# Altium PCB PCB1.PcbDoc
Units mil, origin at the board's own origin, x right, y up, seen from the top; angles counter-clockwise.
Board outline 3025 x 2605 mil, 2 copper layers (Top Layer, Bottom Layer); 24 components, 15 nets, 176 pads, 16 vias.
Unrouted connection lines stored in the file: 2.
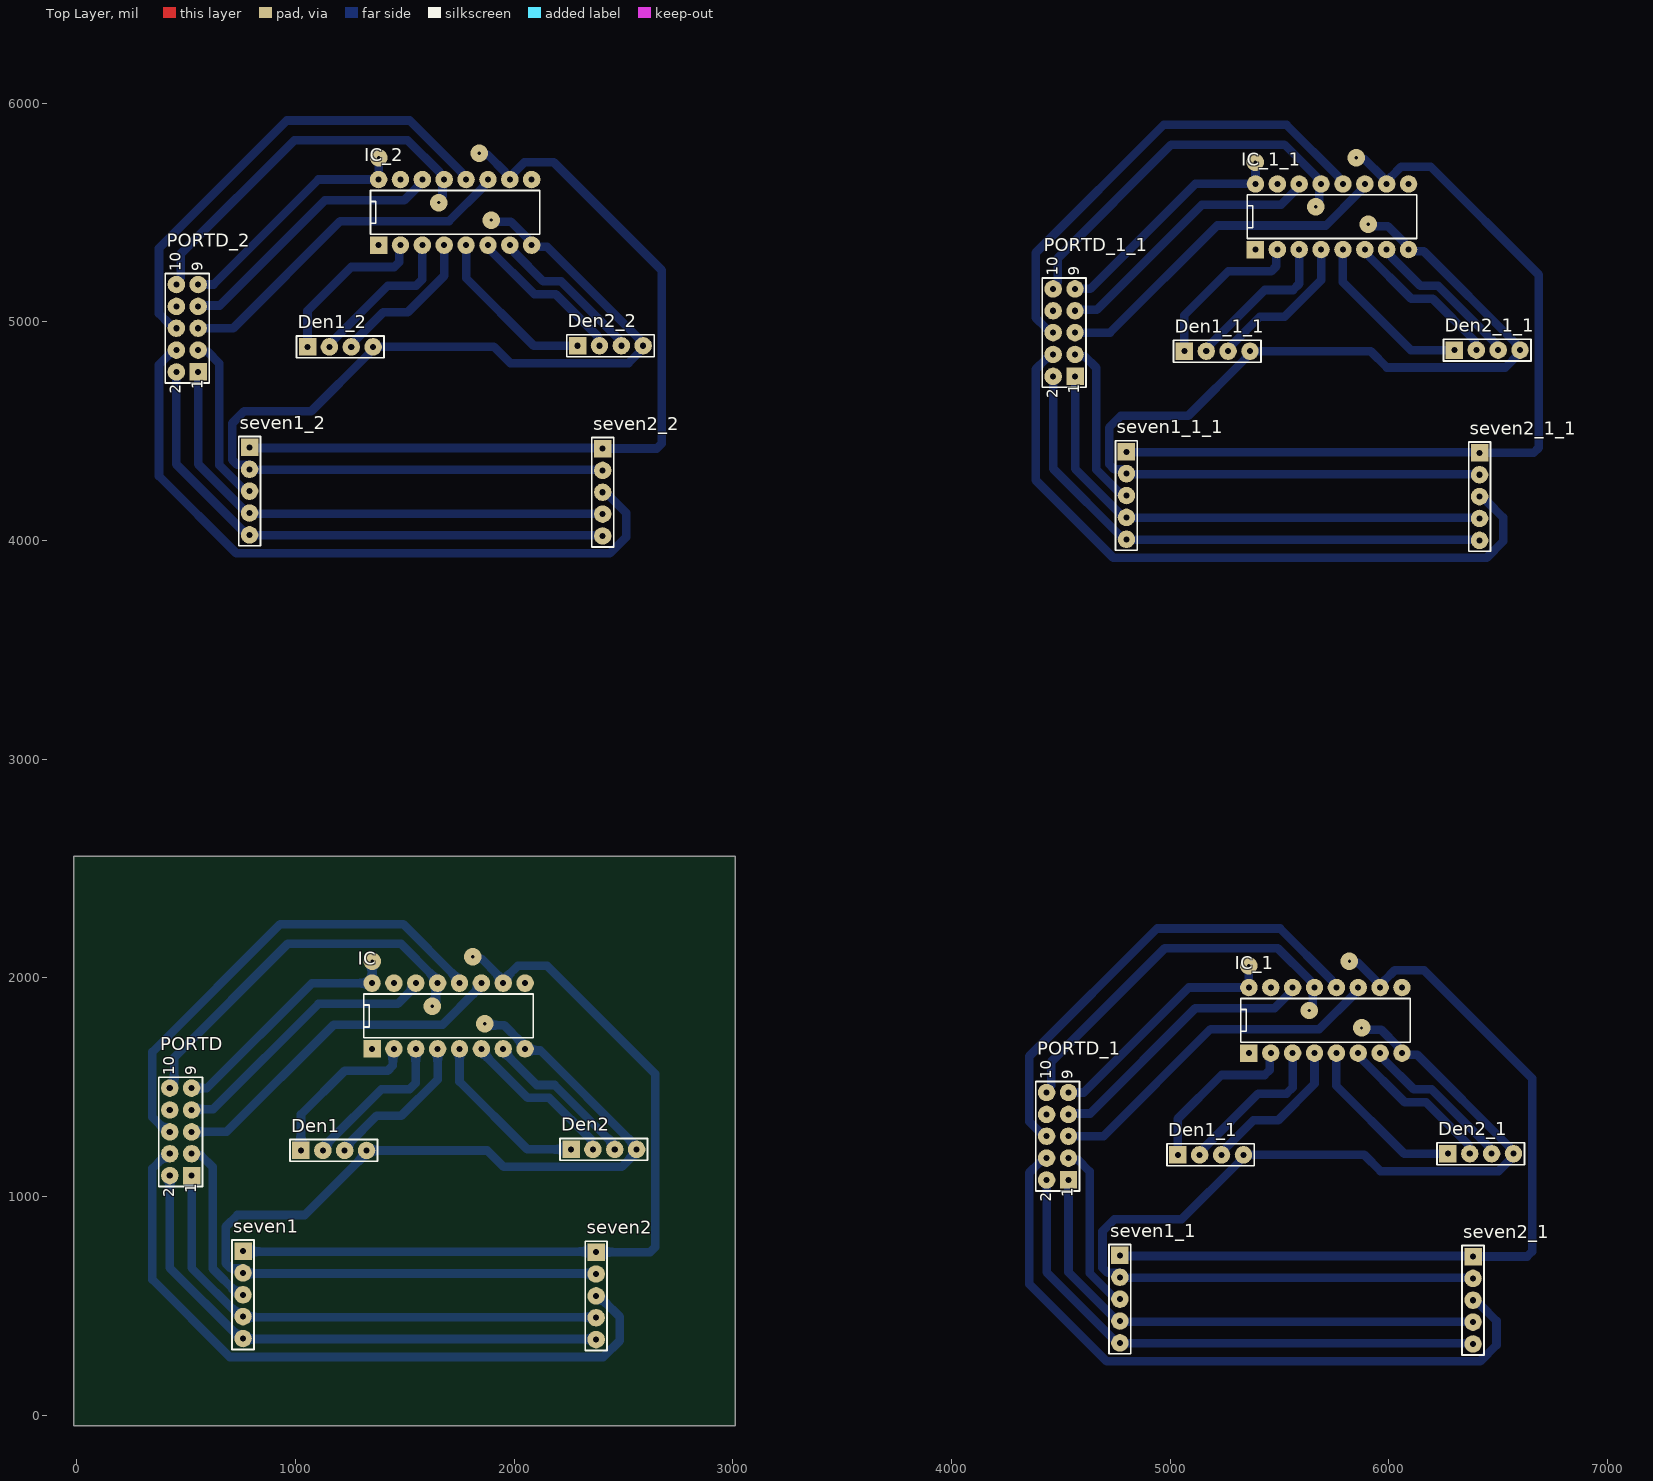
[diagram p0: Top Layer view]
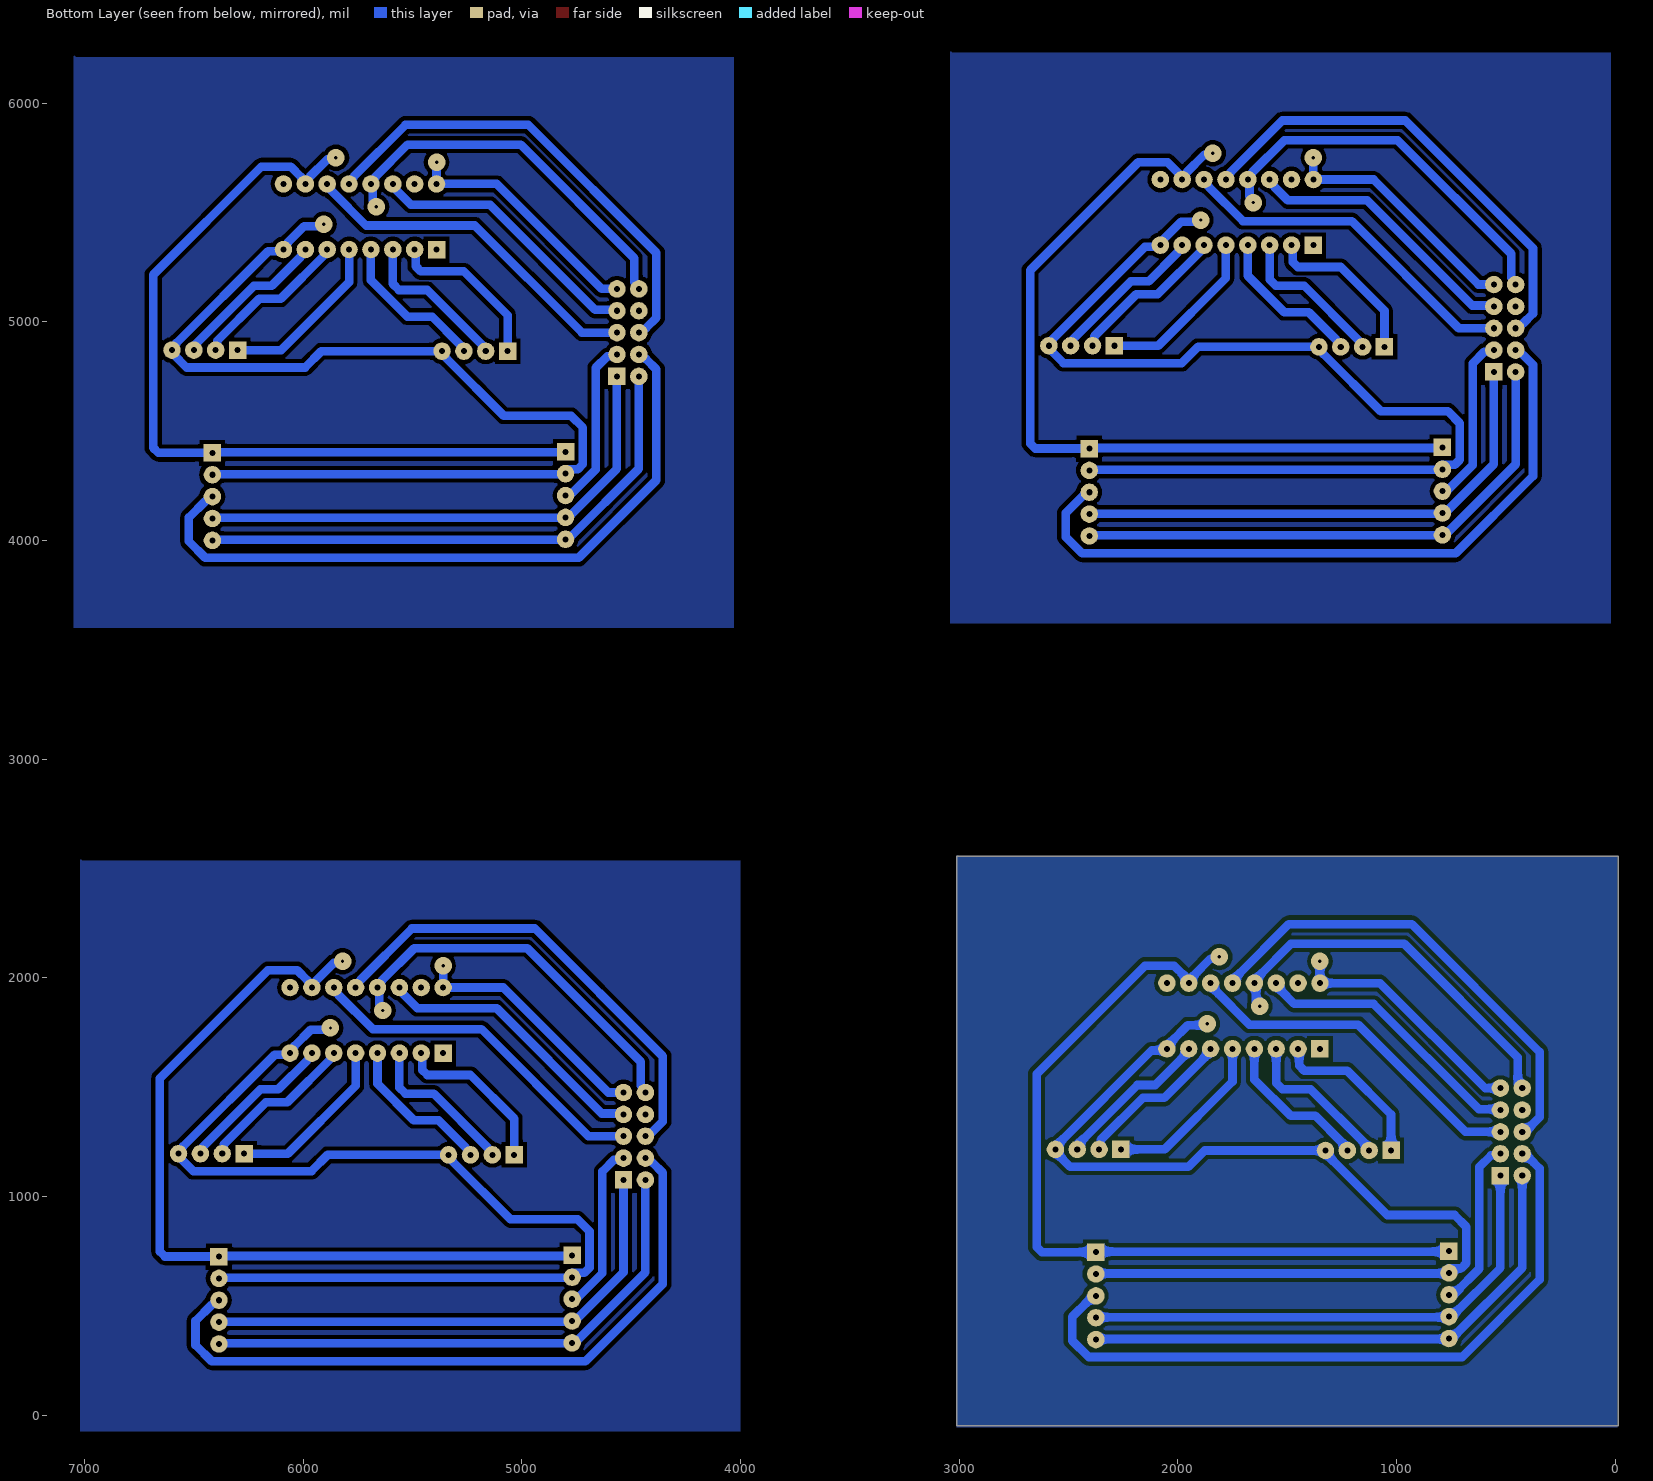
[diagram p1: Bottom Layer view, seen from below]

## Layer stack, top to bottom
Top Solder: solder mask 0.4, Solder Resist, Dk 3.5
Top Layer: signal copper 1.4
Dielectric 1: dielectric 12.6, FR-4, Dk 4.8
Bottom Layer: signal copper 1.4
Bottom Solder: solder mask 0.4, Solder Resist, Dk 3.5

## Board outline
-15,-50 -15,2555 3010,2555 3010,-50

## Design rules (kind name [scope] priority, off if disabled: settings)
Clearance [All] p1: gap=19.68 ignorepadtopadclearanceinfootprint=FALSE
HoleSize [All] p1: absolutevalues=TRUE maxlimit=59.06 minlimit=19.68 maxpercent=80.000 minpercent=20.000
PolygonConnect [All] p1: connectstyle=Relief reliefconductorwidth=10 reliefentries=4 polygonreliefangle="90 Angle" airgapwidth=10
RoutingVias [All] p1: holewidth=28 width=70 viastyle="Through Hole" minholewidth=28 minwidth=70 maxholewidth=28 maxwidth=70
SolderMaskExpansion [All] p1: expansion=4
Width [All] p1: maxlimit=59.06 minlimit=19.68 preferedwidth=39.37 minimp=50.000000 maximp=50.000000 favimp=50.000000
29 further rules are at their usual default settings.

## Components (designator, comment, footprint, x,y, rotation, side; value= is the part's Value field where it differs from the comment)
Den1 "Header 4" HDR1X4 1025,1210 r0 top
Den1_1 "Header 4" HDR1X4 5035,1190 r0 top (schematic designator Den1)
Den1_1_1 "Header 4" HDR1X4 5065,4865 r0 top (schematic designator Den1)
Den1_2 "Header 4" HDR1X4 1055,4885 r0 top (schematic designator Den1)
Den2 "Header 4" HDR1X4 2260,1215 r0 top
Den2_1 "Header 4" HDR1X4 6270,1195 r0 top (schematic designator Den2)
Den2_1_1 "Header 4" HDR1X4 6300,4870 r0 top (schematic designator Den2)
Den2_2 "Header 4" HDR1X4 2290,4890 r0 top (schematic designator Den2)
IC "74HC595" "DIP 16" 1350,1675 r0 top
IC_1 "74HC595" "DIP 16" 5360,1655 r0 top (schematic designator IC)
IC_1_1 "74HC595" "DIP 16" 5390,5330 r0 top (schematic designator IC)
IC_2 "74HC595" "DIP 16" 1380,5350 r0 top (schematic designator IC)
PORTD "Header 5X2" HDR2X5 525,1095 r90 top
PORTD_1 "Header 5X2" HDR2X5 4535,1075 r90 top (schematic designator PORTD)
PORTD_1_1 "Header 5X2" HDR2X5 4565,4750 r90 top (schematic designator PORTD)
PORTD_2 "Header 5X2" HDR2X5 555,4770 r90 top (schematic designator PORTD)
seven1 "Header 5" HDR1X5 760,750 r270 top
seven1_1 "Header 5" HDR1X5 4770,730 r270 top (schematic designator seven1)
seven1_1_1 "Header 5" HDR1X5 4800,4405 r270 top (schematic designator seven1)
seven1_2 "Header 5" HDR1X5 790,4425 r270 top (schematic designator seven1)
seven2 "Header 5" HDR1X5 2375,745 r270 top
seven2_1 "Header 5" HDR1X5 6385,725 r270 top (schematic designator seven2)
seven2_1_1 "Header 5" HDR1X5 6415,4400 r270 top (schematic designator seven2)
seven2_2 "Header 5" HDR1X5 2405,4420 r270 top (schematic designator seven2)

## Footprints (in the part's own frame and the unit in brackets; to place one, negate y for a bottom-side part, rotate by r counter-clockwise, add the part's x,y. Pads: shape width x height; smd on the part's side, far side on the other; paste and mask are expansions set on the pad)
"DIP 16" [mil]
  rect 80x80 hole 27.56: 1(0,0)
  round 80 hole 27.56: 2(100,0) 3(200,0) 4(300,0) 5(400,0) 6(500,0) 7(600,0) 8(700,0) 9(700,300) 10(600,300) 11(500,300) 12(400,300) 13(300,300) 14(200,300) 15(100,300) 16(0,300)
  silkscreen extent -38,50 738,250, body extent -75,-3 775,307, height 185
HDR1X4 [mil] "Connector; Header; 4 Position"
  rect 80x80 hole 27.56: 1(0,0)
  round 80 hole 27.56: 2(100,0) 3(200,0) 4(300,0)
  silkscreen extent -50,-50 350,50
HDR1X5 [mil] "Connector; Header; 5 Position"
  rect 80x80 hole 27.56: 1(0,0)
  round 80 hole 27.56: 2(100,0) 3(200,0) 4(300,0) 5(400,0)
  silkscreen extent -50,-50 450,50
HDR2X5 [mil] "Connector; Header; 5x2 Position"
  rect 80x80 hole 27.56: 1(0,0)
  round 80 hole 27.56: 2(0,100) 3(100,0) 4(100,100) 5(200,0) 6(200,100) 7(300,0) 8(300,100) 9(400,0) 10(400,100)
  silkscreen extent -50,-50 450,150, body extent -48,-50 452,150, height 365

## Part data
Den1 Den1_1 Den1_1_1 Den1_2 Den2 Den2_1 Den2_1_1 Den2_2: "Header, 4-Pin", LatestRevisionDate=17-Jul-2002, LatestRevisionNote="Re-released for DXP Platform.", Publisher="Altium Limited"
IC IC_1 IC_1_1 IC_2: "8-bit serial-in, serial or parallel-out  shift register with output latches;  3-state"
PORTD PORTD_1 PORTD_1_1 PORTD_2: "Header, 5-Pin, Dual row", LatestRevisionDate=17-Jul-2002, LatestRevisionNote="Re-released for DXP Platform.", Publisher="Altium Limited"
seven1 seven1_1 seven1_1_1 seven1_2 seven2 seven2_1 seven2_1_1 seven2_2: "Header, 5-Pin", LatestRevisionDate=17-Jul-2002, LatestRevisionNote="Re-released for DXP Platform.", Publisher="Altium Limited"

## Via types
v1: diameter 80, hole 15.75, Top Layer to Bottom Layer, 16 vias

## Nets (pads, with @x,y where several pads share a name; then routed paths per layer and width w, separated by ;. In a path a pad name is that pad's centre, name@x,y a point inside that pad or via, vN(x,y) a via of type N, cw(c..) or ccw(c..) an arc to the next point about the centre after c; other vN are vias at no path point)
D0: PORTD.1 seven1.4 seven2.4 | length 2366.6
  Bottom Layer w39.37: PORTD.1 525,672.75 739.98,457.77 752.23,457.77 seven1.4 762.5,447.5 2372.5,447.5 seven2.4
D1: PORTD.2 seven1.5 seven2.5 | length 2508
  Bottom Layer w39.37: PORTD.2 425,672.75 739.98,357.77 752.23,357.77 seven1.5 762.5,347.5 2372.5,347.5 seven2.5
D2: PORTD.3 seven1.3 | length 774.5
  Bottom Layer w39.37: PORTD.3 532.77,1187.23 568.45,1187.23 621.57,1134.1 621.57,669.23 733.03,557.77 752.23,557.77 seven1.3
D3: PORTD.4 seven2.3 | length 3186.3
  Bottom Layer w39.37: PORTD.4 414.01,1195 393.38,1174.37 392.12,1174.37 345.63,1127.88 345.63,619.37 699.37,265.63 2407.88,265.63 2482.32,340.07 2482.32,449.93 2407.88,524.37 2406.62,524.37 2385.99,545 seven2.3
D4: IC.11 PORTD.5 | length 1613.8
  Bottom Layer w39.37: PORTD.5 685,1295 1175,1785 1672.25,1785 1829.37,1942.12 1829.37,1943.38 1850,1964.01 IC.11
D5: IC.12 PORTD.6 | length 2171.1
  Bottom Layer w39.37: PORTD.6 414.01,1295 393.38,1315.63 392.12,1315.63 345.63,1362.12 345.63,1660.63 930,2245 1492.25,2245 1729.37,2007.88 1729.37,2006.62 1750,1985.99 IC.12
D6: IC.14 PORTD.7 | length 1272.4
  Bottom Layer w39.37: PORTD.7 529.06,1399.06 624.06,1399.06 1105,1880 1467.25,1880 1529.37,1942.12 1529.37,1943.38 1550,1964.01 IC.14
GND: Den1.4 Den2.4 IC.8 IC.13 PORTD.10 seven1.2 seven2.2 | length 6712.5
  Bottom Layer w39.37: PORTD.10 425,1505.99 445.63,1526.62 445.63,1635.63 965,2155 1482.25,2155 1629.37,2007.88 1629.37,2006.62 1650,1985.99 IC.13 1642.23,1967.23 1642.23,1898.22 1625,1880.99 v1(1625,1870) ; v1(1865,1790) 1872.77,1782.23 1955.02,1782.23 2029.37,1707.88 2029.37,1706.62 2050,1685.99 IC.8 2057.77,1667.23 2120.02,1667.23 2539.37,1247.88 2539.37,1246.62 2560,1225.99 Den2.4 2552.23,1207.23 2552.23,1194.98 2492.88,1135.63 1951.62,1135.63 1877.25,1210 Den1.4 1325,1199.01 1304.37,1178.38 1304.37,1177.12 1042.25,915 735,915 680.63,860.63 680.63,693.69 703.69,670.63 762.5,670.63 762.5,652.5 seven1.2 762.5,647.5 2372.5,647.5 seven2.2
Q2: Den1.1 IC.2 | length 756.4
  Bottom Layer w39.37: Den1.1 1025,1375 1225,1575 1421.94,1575 1445,1598.06 1445,1670 IC.2
Q3: Den1.2 IC.3 | length 716.7
  Bottom Layer w39.37: Den1.2 1125,1220.99 1145.63,1241.62 1145.63,1242.88 1392.75,1490 1521.94,1490 1550,1518.06 IC.3
Q4: Den1.3 IC.4 | length 707.1
  Bottom Layer w39.37: Den1.3 1225,1220.99 1245.63,1241.62 1245.63,1242.88 1370.99,1368.24 1483.69,1368.24 1650,1534.55 IC.4
Q5: Den2.1 IC.5 | length 788.4
  Bottom Layer w39.37: IC.5 1750,1525 2060,1215 Den2.1
Q6: Den2.2 IC.6 | length 728.6
  Bottom Layer w39.37: IC.6 1857.77,1667.23 1857.77,1654.98 2062.47,1450.29 2160.39,1450.29 2352.23,1258.45 2352.23,1222.77 Den2.2
Q7: Den2.3 IC.7 | length 719
  Bottom Layer w39.37: IC.7 1950,1664.01 1970.63,1643.38 1970.63,1642.12 2103.41,1509.34 2184.85,1509.34 2452.23,1241.97 2452.23,1222.77 Den2.3
VCC: IC.10 IC.16 PORTD.9 seven1.1 seven2.1 | length 4949.1
  Bottom Layer w39.37: PORTD.9 595,1495 1075,1975 IC.16 v1(1350,2075) ; seven1.1 762.5,747.5 2372.5,747.5 seven2.1 2621.94,745 2645,768.06 2645,1560 2150.63,2054.37 2017.12,2054.37 1970,2007.25 1970,2005.99 IC.10@1950,1985.99 ; v1(1810,2095) 1817.77,2087.23 1850.02,2087.23 1929.37,2007.88 1929.37,2006.62 IC.10@1950,1985.99 ; IC.10@1942.23,1982.77 IC.10 IC.10@1950,1985.99
pads on no net: Den1_1.1 Den1_1.2 Den1_1.3 Den1_1.4 Den1_1_1.1 Den1_1_1.2 Den1_1_1.3 Den1_1_1.4 Den1_2.1 Den1_2.2 Den1_2.3 Den1_2.4 Den2_1.1 Den2_1.2 Den2_1.3 Den2_1.4 Den2_1_1.1 Den2_1_1.2 Den2_1_1.3 Den2_1_1.4 Den2_2.1 Den2_2.2 Den2_2.3 Den2_2.4 IC.1 IC.9 IC.15 IC_1.1 IC_1.2 IC_1.3 IC_1.4 IC_1.5 IC_1.6 IC_1.7 IC_1.8 IC_1.9 IC_1.10 IC_1.11 IC_1.12 IC_1.13 IC_1.14 IC_1.15 IC_1.16 IC_1_1.1 IC_1_1.2 IC_1_1.3 IC_1_1.4 IC_1_1.5 IC_1_1.6 IC_1_1.7 IC_1_1.8 IC_1_1.9 IC_1_1.10 IC_1_1.11 IC_1_1.12 IC_1_1.13 IC_1_1.14 IC_1_1.15 IC_1_1.16 IC_2.1 IC_2.2 IC_2.3 IC_2.4 IC_2.5 IC_2.6 IC_2.7 IC_2.8 IC_2.9 IC_2.10 IC_2.11 IC_2.12 IC_2.13 IC_2.14 IC_2.15 IC_2.16 PORTD.8 PORTD_1.1 PORTD_1.2 PORTD_1.3 PORTD_1.4 PORTD_1.5 PORTD_1.6 PORTD_1.7 PORTD_1.8 PORTD_1.9 PORTD_1.10 PORTD_1_1.1 PORTD_1_1.2 PORTD_1_1.3 PORTD_1_1.4 PORTD_1_1.5 PORTD_1_1.6 PORTD_1_1.7 PORTD_1_1.8 PORTD_1_1.9 PORTD_1_1.10 PORTD_2.1 PORTD_2.2 PORTD_2.3 PORTD_2.4 PORTD_2.5 PORTD_2.6 PORTD_2.7 PORTD_2.8 PORTD_2.9 PORTD_2.10 seven1_1.1 seven1_1.2 seven1_1.3 seven1_1.4 seven1_1.5 seven1_1_1.1 seven1_1_1.2 seven1_1_1.3 seven1_1_1.4 seven1_1_1.5 seven1_2.1 seven1_2.2 seven1_2.3 seven1_2.4 seven1_2.5 seven2_1.1 seven2_1.2 seven2_1.3 seven2_1.4 seven2_1.5 seven2_1_1.1 seven2_1_1.2 seven2_1_1.3 seven2_1_1.4 seven2_1_1.5 seven2_2.1 seven2_2.2 seven2_2.3 seven2_2.4 seven2_2.5
copper on no net: | length 89911.4
  Bottom Layer w39.37: 455,4770 455,4347.75 769.98,4032.77 782.23,4032.77 790,4025 792.5,4022.5 2402.5,4022.5 2405,4020 ; 455,4870 444.01,4870 423.38,4849.37 422.12,4849.37 375.63,4802.88 375.63,4294.37 729.37,3940.63 2437.88,3940.63 2512.32,4015.07 2512.32,4124.93 2437.88,4199.37 2436.62,4199.37 2415.99,4220 2405,4220 ; 455,4970 444.01,4970 423.38,4990.63 422.12,4990.63 375.63,5037.12 375.63,5335.63 960,5920 1522.25,5920 1759.37,5682.88 1759.37,5681.62 1780,5660.99 1780,5650 ; 455,5170 455,5180.99 475.63,5201.62 475.63,5310.63 995,5830 1512.25,5830 1659.37,5682.88 1659.37,5681.62 1680,5660.99 1680,5650 1672.23,5642.23 1672.23,5573.22 1655,5555.99 v1(1655,5545) ; 555,4770 555,4347.75 769.98,4132.77 782.23,4132.77 790,4125 792.5,4122.5 2402.5,4122.5 2405,4120 ; 555,4870 562.77,4862.23 598.45,4862.23 651.57,4809.1 651.57,4344.23 763.03,4232.77 782.23,4232.77 790,4225 ; 555,4970 715,4970 1205,5460 1702.25,5460 1859.37,5617.12 1859.37,5618.38 1880,5639.01 1880,5650 ; 555,5070 559.06,5074.06 654.06,5074.06 1135,5555 1497.25,5555 1559.37,5617.12 1559.37,5618.38 1580,5639.01 1580,5650 ; 555,5170 625,5170 1105,5650 1380,5650 v1(1380,5750) ; 790,4425 792.5,4422.5 2402.5,4422.5 2405,4420 2651.94,4420 2675,4443.06 2675,5235 2180.63,5729.37 2047.12,5729.37 2000,5682.25 2000,5680.99 1980,5660.99 ; 1055,4885 1055,5050 1255,5250 1451.94,5250 1475,5273.06 1475,5345 1480,5350 ; 1155,4885 1155,4895.99 1175.63,4916.62 1175.63,4917.88 1422.75,5165 1551.94,5165 1580,5193.06 1580,5350 ; 1255,4885 1255,4895.99 1275.63,4916.62 1275.63,4917.88 1400.99,5043.24 1513.69,5043.24 1680,5209.55 1680,5350 ; 1780,5350 1780,5200 2090,4890 2290,4890 ; v1(1840,5770) 1847.77,5762.23 1880.02,5762.23 1959.37,5682.88 1959.37,5681.62 1980,5660.99 ; 1880,5350 1887.77,5342.23 1887.77,5329.98 2092.47,5125.29 2190.39,5125.29 2382.23,4933.45 2382.23,4897.77 2390,4890 ; v1(1895,5465) 1902.77,5457.23 1985.02,5457.23 2059.37,5382.88 2059.37,5381.62 2080,5360.99 2080,5350 2087.77,5342.23 2150.02,5342.23 2569.37,4922.88 2569.37,4921.62 2590,4900.99 2590,4890 2582.23,4882.23 2582.23,4869.98 2522.88,4810.63 1981.62,4810.63 1907.25,4885 1355,4885 1355,4874.01 1334.37,4853.38 1334.37,4852.12 1072.25,4590 765,4590 710.63,4535.63 710.63,4368.69 733.69,4345.63 792.5,4345.63 792.5,4327.5 790,4325 792.5,4322.5 2402.5,4322.5 2405,4320 ; 1972.23,5657.77 1980,5650 1980,5660.99 ; 1980,5350 1980,5339.01 2000.63,5318.38 2000.63,5317.12 2133.41,5184.34 2214.85,5184.34 2482.23,4916.97 2482.23,4897.77 2490,4890 ; 4435,1075 4435,652.75 4749.98,337.77 4762.23,337.77 4770,330 4772.5,327.5 6382.5,327.5 6385,325 ; 4435,1175 4424.01,1175 4403.38,1154.37 4402.12,1154.37 4355.63,1107.88 4355.63,599.37 4709.37,245.63 6417.88,245.63 6492.32,320.07 6492.32,429.93 6417.88,504.37 6416.62,504.37 6395.99,525 6385,525 ; 4435,1275 4424.01,1275 4403.38,1295.63 4402.12,1295.63 4355.63,1342.12 4355.63,1640.63 4940,2225 5502.25,2225 5739.37,1987.88 5739.37,1986.62 5760,1965.99 5760,1955 ; 4435,1475 4435,1485.99 4455.63,1506.62 4455.63,1615.63 4975,2135 5492.25,2135 5639.37,1987.88 5639.37,1986.62 5660,1965.99 5660,1955 5652.23,1947.23 5652.23,1878.22 5635,1860.99 v1(5635,1850) ; 4465,4750 4465,4327.75 4779.98,4012.77 4792.23,4012.77 4800,4005 4802.5,4002.5 6412.5,4002.5 6415,4000 ; 4465,4850 4454.01,4850 4433.38,4829.37 4432.12,4829.37 4385.63,4782.88 4385.63,4274.37 4739.37,3920.63 6447.88,3920.63 6522.32,3995.07 6522.32,4104.93 6447.88,4179.37 6446.62,4179.37 6425.99,4200 6415,4200 ; 4465,4950 4454.01,4950 4433.38,4970.63 4432.12,4970.63 4385.63,5017.12 4385.63,5315.63 4970,5900 5532.25,5900 5769.37,5662.88 5769.37,5661.62 5790,5640.99 5790,5630 ; 4465,5150 4465,5160.99 4485.63,5181.62 4485.63,5290.63 5005,5810 5522.25,5810 5669.37,5662.88 5669.37,5661.62 5690,5640.99 5690,5630 5682.23,5622.23 5682.23,5553.22 5665,5535.99 v1(5665,5525) ; 4535,1075 4535,652.75 4749.98,437.77 4762.23,437.77 4770,430 4772.5,427.5 6382.5,427.5 6385,425 ; 4535,1175 4542.77,1167.23 4578.45,1167.23 4631.57,1114.1 4631.57,649.23 4743.03,537.77 4762.23,537.77 4770,530 ; 4535,1275 4695,1275 5185,1765 5682.25,1765 5839.37,1922.12 5839.37,1923.38 5860,1944.01 5860,1955 ; 4535,1375 4539.06,1379.06 4634.06,1379.06 5115,1860 5477.25,1860 5539.37,1922.12 5539.37,1923.38 5560,1944.01 5560,1955 ; 4535,1475 4605,1475 5085,1955 5360,1955 v1(5360,2055) ; 4565,4750 4565,4327.75 4779.98,4112.77 4792.23,4112.77 4800,4105 4802.5,4102.5 6412.5,4102.5 6415,4100 ; 4565,4850 4572.77,4842.23 4608.45,4842.23 4661.57,4789.1 4661.57,4324.23 4773.03,4212.77 4792.23,4212.77 4800,4205 ; 4565,4950 4725,4950 5215,5440 5712.25,5440 5869.37,5597.12 5869.37,5598.38 5890,5619.01 5890,5630 ; 4565,5050 4569.06,5054.06 4664.06,5054.06 5145,5535 5507.25,5535 5569.37,5597.12 5569.37,5598.38 5590,5619.01 5590,5630 ; 4565,5150 4635,5150 5115,5630 5390,5630 v1(5390,5730) ; 4770,730 4772.5,727.5 6382.5,727.5 6385,725 6631.94,725 6655,748.06 6655,1540 6160.63,2034.37 6027.12,2034.37 5980,1987.25 5980,1985.99 5960,1965.99 ; 4800,4405 4802.5,4402.5 6412.5,4402.5 6415,4400 6661.94,4400 6685,4423.06 6685,5215 6190.63,5709.37 6057.12,5709.37 6010,5662.25 6010,5660.99 5990,5640.99 ; 5035,1190 5035,1355 5235,1555 5431.94,1555 5455,1578.06 5455,1650 5460,1655 ; 5065,4865 5065,5030 5265,5230 5461.94,5230 5485,5253.06 5485,5325 5490,5330 ; 5135,1190 5135,1200.99 5155.63,1221.62 5155.63,1222.88 5402.75,1470 5531.94,1470 5560,1498.06 5560,1655 ; 5165,4865 5165,4875.99 5185.63,4896.62 5185.63,4897.88 5432.75,5145 5561.94,5145 5590,5173.06 5590,5330 ; 5235,1190 5235,1200.99 5255.63,1221.62 5255.63,1222.88 5380.99,1348.24 5493.69,1348.24 5660,1514.55 5660,1655 ; 5265,4865 5265,4875.99 5285.63,4896.62 5285.63,4897.88 5410.99,5023.24 5523.69,5023.24 5690,5189.55 5690,5330 ; 5760,1655 5760,1505 6070,1195 6270,1195 ; 5790,5330 5790,5180 6100,4870 6300,4870 ; v1(5820,2075) 5827.77,2067.23 5860.02,2067.23 5939.37,1987.88 5939.37,1986.62 5960,1965.99 ; v1(5850,5750) 5857.77,5742.23 5890.02,5742.23 5969.37,5662.88 5969.37,5661.62 5990,5640.99 ; 5860,1655 5867.77,1647.23 5867.77,1634.98 6072.47,1430.29 6170.39,1430.29 6362.23,1238.45 6362.23,1202.77 6370,1195 ; v1(5875,1770) 5882.77,1762.23 5965.02,1762.23 6039.37,1687.88 6039.37,1686.62 6060,1665.99 6060,1655 6067.77,1647.23 6130.02,1647.23 6549.37,1227.88 6549.37,1226.62 6570,1205.99 6570,1195 6562.23,1187.23 6562.23,1174.98 6502.88,1115.63 5961.62,1115.63 5887.25,1190 5335,1190 5335,1179.01 5314.37,1158.38 5314.37,1157.12 5052.25,895 4745,895 4690.63,840.63 4690.63,673.69 4713.69,650.63 4772.5,650.63 4772.5,632.5 4770,630 4772.5,627.5 6382.5,627.5 6385,625 ; 5890,5330 5897.77,5322.23 5897.77,5309.98 6102.47,5105.29 6200.39,5105.29 6392.23,4913.45 6392.23,4877.77 6400,4870 ; v1(5905,5445) 5912.77,5437.23 5995.02,5437.23 6069.37,5362.88 6069.37,5361.62 6090,5340.99 6090,5330 6097.77,5322.23 6160.02,5322.23 6579.37,4902.88 6579.37,4901.62 6600,4880.99 6600,4870 6592.23,4862.23 6592.23,4849.98 6532.88,4790.63 5991.62,4790.63 5917.25,4865 5365,4865 5365,4854.01 5344.37,4833.38 5344.37,4832.12 5082.25,4570 4775,4570 4720.63,4515.63 4720.63,4348.69 4743.69,4325.63 4802.5,4325.63 4802.5,4307.5 4800,4305 4802.5,4302.5 6412.5,4302.5 6415,4300 ; 5952.23,1962.77 5960,1955 5960,1965.99 ; 5960,1655 5960,1644.01 5980.63,1623.38 5980.63,1622.12 6113.41,1489.34 6194.85,1489.34 6462.23,1221.97 6462.23,1202.77 6470,1195 ; 5982.23,5637.77 5990,5630 5990,5640.99 ; 5990,5330 5990,5319.01 6010.63,5298.38 6010.63,5297.12 6143.41,5164.34 6224.85,5164.34 6492.23,4896.97 6492.23,4877.77 6500,4870

## Polygon pours and split planes (outlines as drawn)
no net on Bottom Layer (solid, pour order 64): 20,6230 3030,6230 3040,6240 3040,3620 20,3620
no net on Bottom Layer (solid, pour order 62): 4030,6210 7040,6210 7050,6220 7050,3600 4030,3600
no net on Bottom Layer (solid, pour order 60): 4000,2535 7010,2535 7020,2545 7020,-75 4000,-75
no net on Bottom Layer (solid, pour order 58): -10,2555 3000,2555 3010,2565 3010,-55 -10,-55

## Text inside footprints (layer, text, board x,y; h text height)
PORTD: Top Overlay "2" at 445,995 h50 r90; Top Overlay "1" at 545,1015 h50 r90; Top Overlay "9" at 545,1555 h50 r90; Top Overlay "10" at 445,1555 h50 r90
PORTD_1: Top Overlay "10" at 4455,1535 h50 r90; Top Overlay "9" at 4555,1535 h50 r90; Top Overlay "1" at 4555,995 h50 r90; Top Overlay "2" at 4455,975 h50 r90
PORTD_1_1: Top Overlay "10" at 4485,5210 h50 r90; Top Overlay "9" at 4585,5210 h50 r90; Top Overlay "1" at 4585,4670 h50 r90; Top Overlay "2" at 4485,4650 h50 r90
PORTD_2: Top Overlay "10" at 475,5230 h50 r90; Top Overlay "9" at 575,5230 h50 r90; Top Overlay "1" at 575,4690 h50 r90; Top Overlay "2" at 475,4670 h50 r90